# Altium PCB 74HC595_update.PcbDoc (part 2 of 2)
Units mil, origin at the board's own origin, x right, y up, seen from the top; angles counter-clockwise.
Board outline 2530 x 3200 mil, 2 copper layers (Top Layer, Bottom Layer); 370 components, 74 nets, 1020 pads, 340 vias.
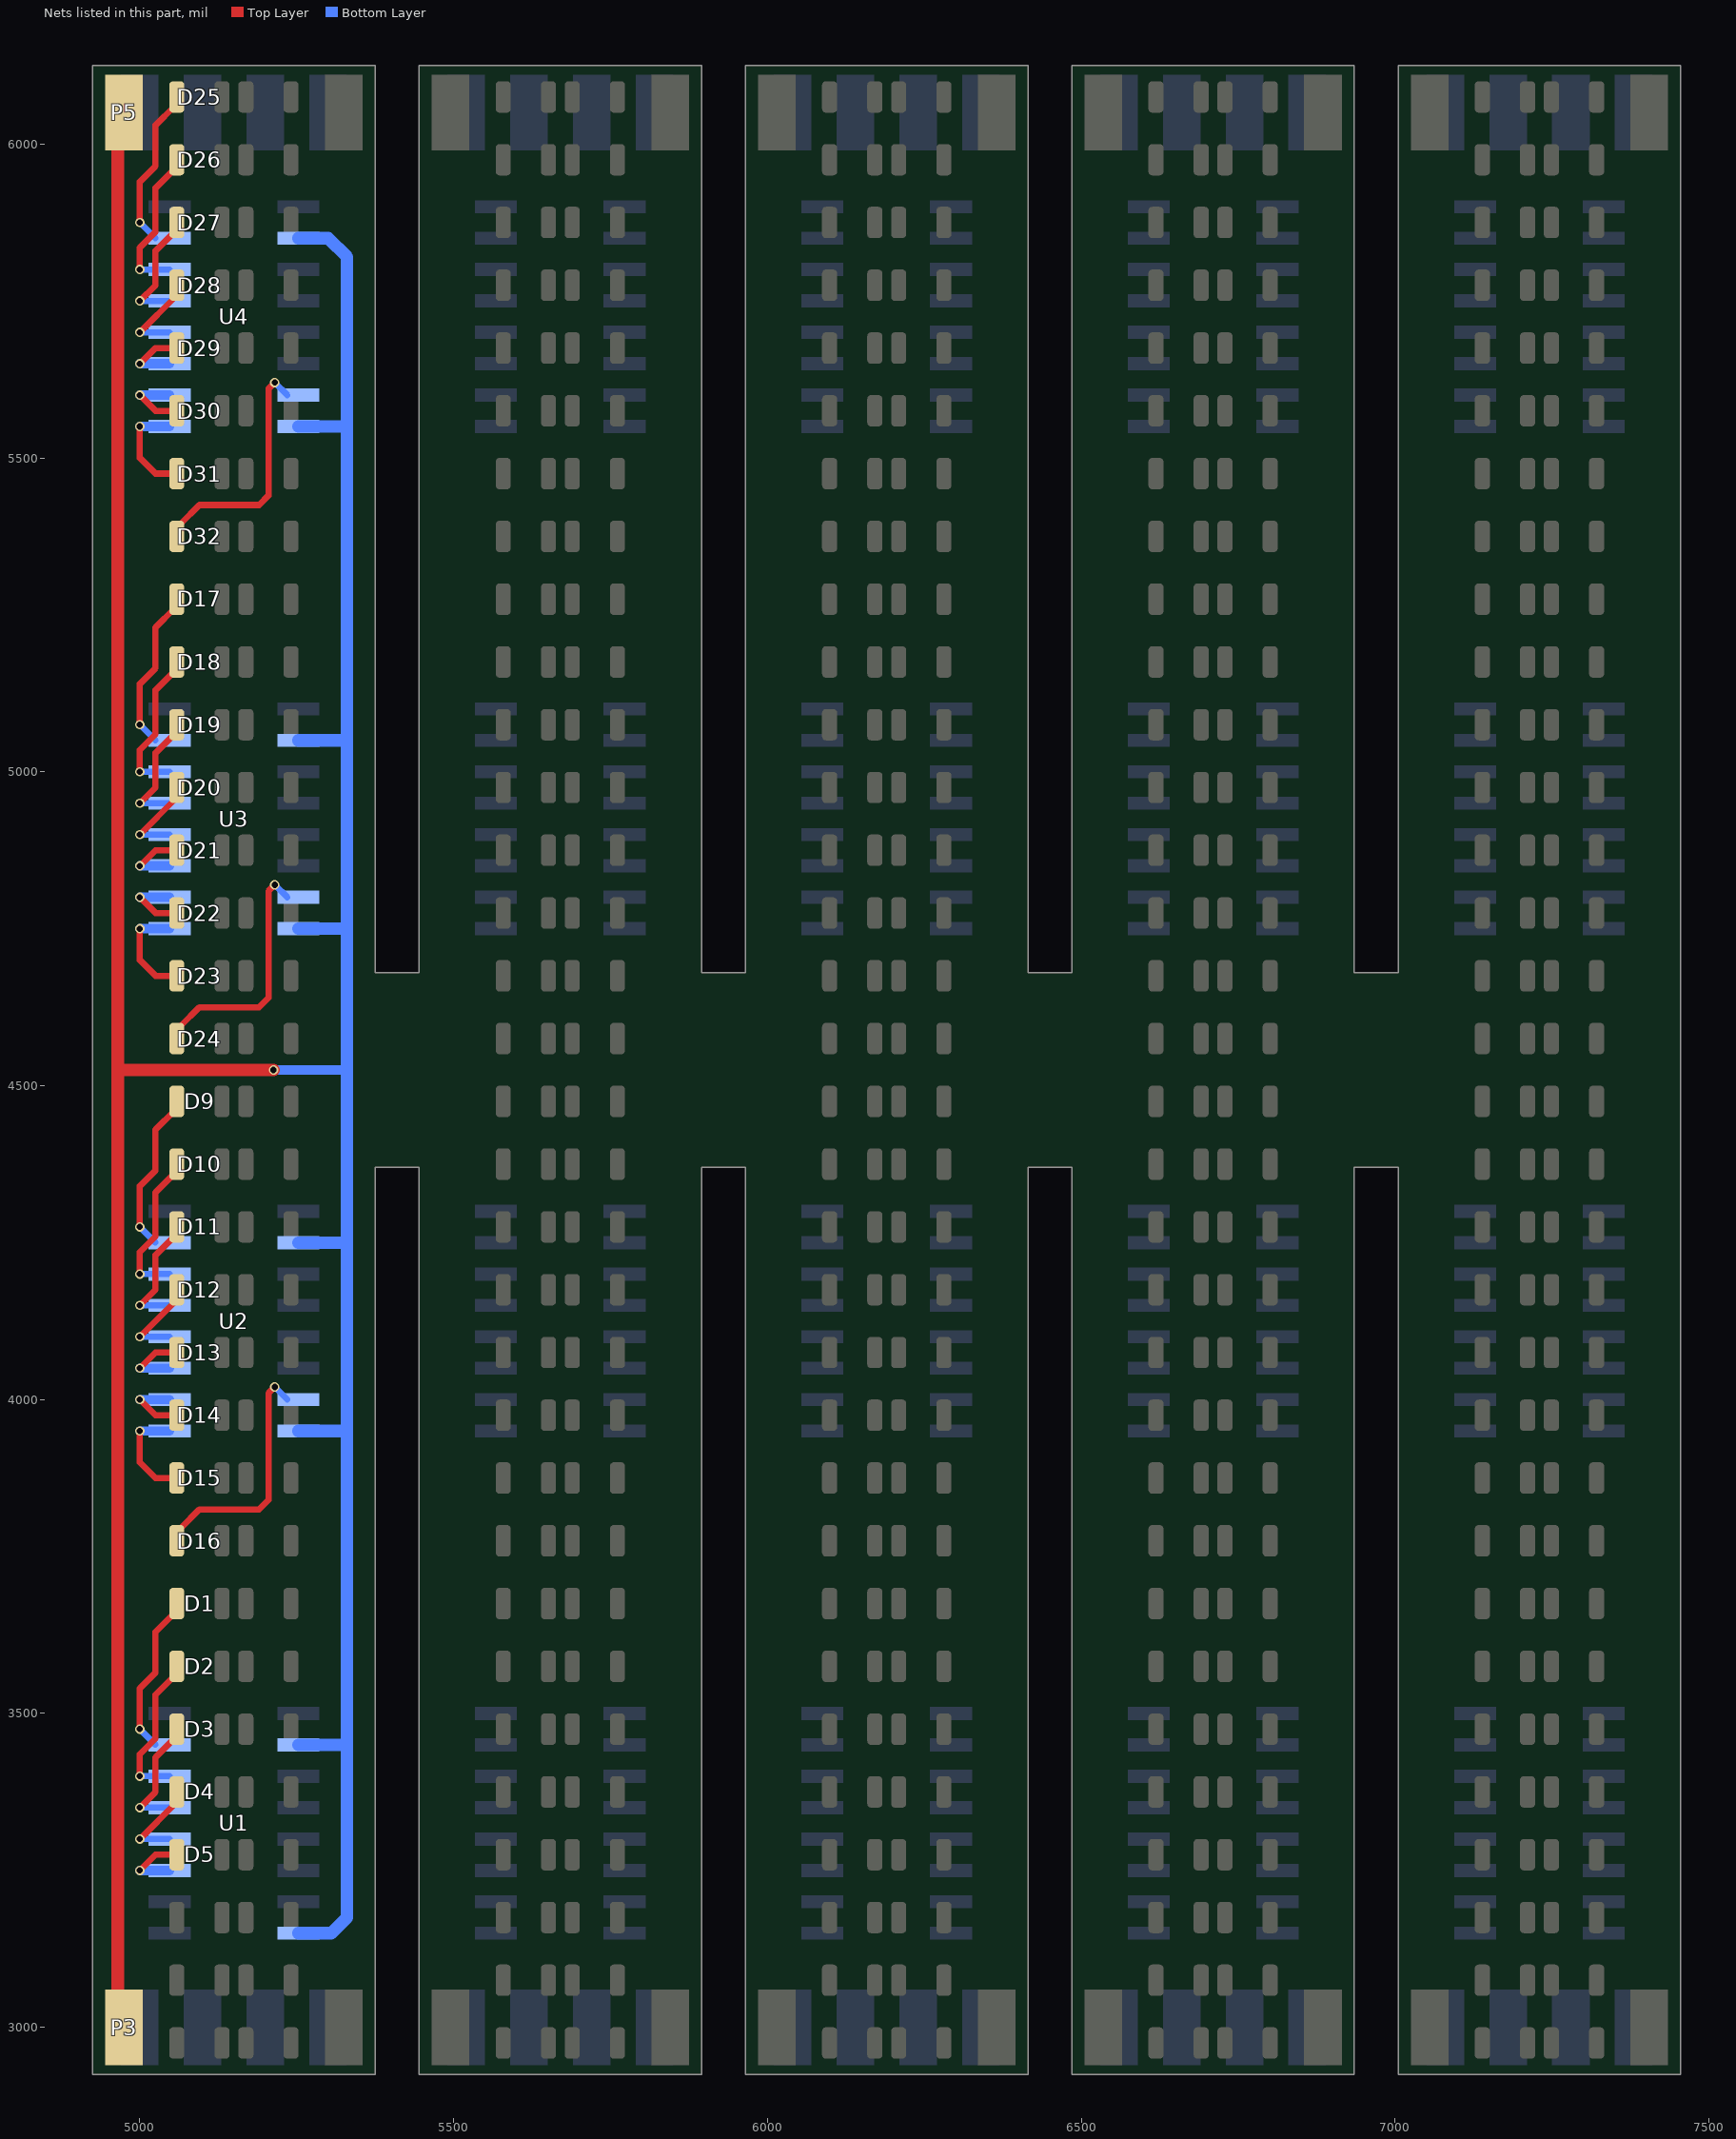
[diagram p2: the nets of this part, all layers, seen from the top]

## Via types
v1: diameter 15, hole 10, Top Layer to Bottom Layer, 340 vias

## Nets (pads, with @x,y where several pads share a name; then routed paths per layer and width w, separated by ;. In a path a pad name is that pad's centre, name@x,y a point inside that pad or via, vN(x,y) a via of type N, cw(c..) or ccw(c..) an arc to the next point about the centre after c; other vN are vias at no path point) (continued)
Q_A3: D5.2 U1.3 | length 116.9
  Top Layer w10: v1(5000,3250) 5025,3275 D5.2@5059,3275
  Bottom Layer w15: v1(5000,3250) U1.3@5047.5,3250
  other v1: 5000,3250
Q_A4: D4.2 U1.4 | length 128.8
  Top Layer w10: v1(5000,3300) D4.2@5057.5,3357.5
  Bottom Layer w10: v1(5000,3300) U1.4@5047.5,3300
  other v1: 5000,3300
Q_A5: D3.2 U1.5 | length 173.2
  Top Layer w10: v1(5000,3350) 5025,3375 5025,3430 D3.2@5050,3455
  Bottom Layer w10: v1(5000,3350) U1.5@5047.5,3350
  other v1: 5000,3350
Q_A6: D2.2 U1.6 | length 223.2
  Top Layer w10: v1(5000,3400) 5000,3435 5025,3460 5025,3530 D2.2@5050,3555
  Bottom Layer w10: v1(5000,3400) U1.6@5047.5,3400
  other v1: 5000,3400
Q_A7: D1.2 U1.7 | length 243.1
  Top Layer w10: v1(5000,3475) 5000,3540 5025,3565 5025,3630 D1.2@5055,3660
  Bottom Layer w10: v1(5000,3475) U1.7@5025,3450
  other v1: 5000,3475
Q_B0: D16.2 U2.15 | length 371.1
  Top Layer w10: D16.2@5065,3795 5095,3825 5190,3825 5205,3840 5205,4010 v1(5215,4020)
  Bottom Layer w10: v1(5215,4020) U2.15@5235,4000
Q_B1: D15.2 U2.1 | length 166.9
  Top Layer w10: v1(5000,3950) 5000,3900 5025,3875 D15.2@5059,3875
  Bottom Layer w15: v1(5000,3950) U2.1@5047.5,3950
Q_B2: D14.2 U2.2 | length 116.9
  Top Layer w10: v1(5000,4000) 5025,3975 D14.2@5059,3975
  Bottom Layer w15: v1(5000,4000) U2.2@5047.5,4000
Q_B3: D13.2 U2.3 | length 116.9
  Top Layer w10: v1(5000,4050) 5025,4075 D13.2@5059,4075
  Bottom Layer w15: v1(5000,4050) U2.3@5047.5,4050
  other v1: 5000,4050
Q_B4: D12.2 U2.4 | length 128.8
  Top Layer w10: v1(5000,4100) D12.2@5057.5,4157.5
  Bottom Layer w10: v1(5000,4100) U2.4@5047.5,4100
  other v1: 5000,4100
Q_B5: D11.2 U2.5 | length 173.2
  Top Layer w10: v1(5000,4150) 5025,4175 5025,4230 D11.2@5050,4255
  Bottom Layer w10: v1(5000,4150) U2.5@5047.5,4150
  other v1: 5000,4150
Q_B6: D10.2 U2.6 | length 223.2
  Top Layer w10: v1(5000,4200) 5000,4235 5025,4260 5025,4330 D10.2@5050,4355
  Bottom Layer w10: v1(5000,4200) U2.6@5047.5,4200
  other v1: 5000,4200
Q_B7: D9.2 U2.7 | length 243.1
  Top Layer w10: v1(5000,4275) 5000,4340 5025,4365 5025,4430 D9.2@5055,4460
  Bottom Layer w10: v1(5000,4275) U2.7@5025,4250
  other v1: 5000,4275
Q_C0: D24.2 U3.15 | length 371.1
  Top Layer w10: D24.2@5065,4595 5095,4625 5190,4625 5205,4640 5205,4810 v1(5215,4820)
  Bottom Layer w10: v1(5215,4820) U3.15@5235,4800
Q_C1: D23.2 U3.1 | length 166.9
  Top Layer w10: v1(5000,4750) 5000,4700 5025,4675 D23.2@5059,4675
  Bottom Layer w15: v1(5000,4750) U3.1@5047.5,4750
Q_C2: D22.2 U3.2 | length 116.9
  Top Layer w10: v1(5000,4800) 5025,4775 D22.2@5059,4775
  Bottom Layer w15: v1(5000,4800) U3.2@5047.5,4800
Q_C3: D21.2 U3.3 | length 164.4
  Top Layer w10: v1(5000,4850) 5025,4875 D21.2@5059,4875
  Bottom Layer w15: v1(5000,4850) U3.3@5047.5,4850 v1(5000,4850)
  other v1: 5000,4850
Q_C4: D20.2 U3.4 | length 176.3
  Top Layer w10: v1(5000,4900) D20.2@5057.5,4957.5
  Bottom Layer w10: v1(5000,4900) U3.4@5047.5,4900 v1(5000,4900)
  other v1: 5000,4900
Q_C5: D19.2 U3.5 | length 173.2
  Top Layer w10: v1(5000,4950) 5025,4975 5025,5030 D19.2@5050,5055
  Bottom Layer w10: v1(5000,4950) U3.5@5047.5,4950
  other v1: 5000,4950
Q_C6: D18.2 U3.6 | length 223.2
  Top Layer w10: v1(5000,5000) 5000,5035 5025,5060 5025,5130 D18.2@5050,5155
  Bottom Layer w10: v1(5000,5000) U3.6@5047.5,5000
  other v1: 5000,5000
Q_C7: D17.2 U3.7 | length 243.1
  Top Layer w10: v1(5000,5075) 5000,5140 5025,5165 5025,5230 D17.2@5055,5260
  Bottom Layer w10: v1(5000,5075) U3.7@5025,5050
  other v1: 5000,5075
Q_D0: D32.2 U4.15 | length 371.1
  Top Layer w10: D32.2@5065,5395 5095,5425 5190,5425 5205,5440 5205,5610 v1(5215,5620)
  Bottom Layer w10: v1(5215,5620) U4.15@5235,5600
Q_D1: D31.2 U4.1 | length 166.9
  Top Layer w10: v1(5000,5550) 5000,5500 5025,5475 D31.2@5059,5475
  Bottom Layer w15: v1(5000,5550) U4.1@5047.5,5550
Q_D2: D30.2 U4.2 | length 116.9
  Top Layer w10: v1(5000,5600) 5025,5575 D30.2@5059,5575
  Bottom Layer w15: v1(5000,5600) U4.2@5047.5,5600
Q_D3: D29.2 U4.3 | length 116.9
  Top Layer w10: v1(5000,5650) 5025,5675 D29.2@5059,5675
  Bottom Layer w15: v1(5000,5650) U4.3@5047.5,5650
Q_D4: D28.2 U4.4 | length 128.8
  Top Layer w10: v1(5000,5700) D28.2@5057.5,5757.5
  Bottom Layer w10: v1(5000,5700) U4.4@5047.5,5700
Q_D5: D27.2 U4.5 | length 173.2
  Top Layer w10: v1(5000,5750) 5025,5775 5025,5830 D27.2@5050,5855
  Bottom Layer w10: v1(5000,5750) U4.5@5047.5,5750
Q_D6: D26.2 U4.6 | length 223.2
  Top Layer w10: v1(5000,5800) 5000,5835 5025,5860 5025,5930 D26.2@5050,5955
  Bottom Layer w10: v1(5000,5800) U4.6@5047.5,5800
Q_D7: D25.2 U4.7 | length 243.1
  Top Layer w10: v1(5000,5875) 5000,5940 5025,5965 5025,6030 D25.2@5055,6060
  Bottom Layer w10: v1(5000,5875) U4.7@5025,5850
VCC: P3.1 P5.1 U1.10 U1.16 U2.10 U2.16 U3.10 U3.16 U4.10 U4.16 | length 6738.1
  Top Layer w10: P3.1@4975,3000 P3.1@5000,2975
  Top Layer w20: P3.1@4965,3000 4965,4525 ; P5.1@4965,6050 4965,4525 ; v1(5213,4525) 4965,4525
  Bottom Layer w15: v1(5213,4525) 5330,4525
  Bottom Layer w20: U1.16@5252.5,3150 5305,3150 5330,3175 5330,3450 ; U1.10@5252.5,3450 5330,3450 ; U2.16@5252.5,3950 5330,3950 ; U2.10@5252.5,4250 5330,4250 ; U3.16@5252.5,4750 5330,4750 ; U3.10@5252.5,5050 5330,5050 ; U4.16@5252.5,5550 5330,5550 ; U4.10@5252.5,5850 5300,5850 5330,5820 5330,5550 ; 5330,3450 5330,3950 ; 5330,3950 5330,4250 ; 5330,4250 5330,4525 5330,4750 ; 5330,4750 5330,5050 ; 5330,5050 5330,5550
pads on no net: D1_1.1 D1_1.2 D1_1_1.1 D1_1_1.2 D1_1_2.1 D1_1_2.2 D1_1_3.1 D1_1_3.2 D2_1.1 D2_1.2 D2_1_1.1 D2_1_1.2 D2_1_2.1 D2_1_2.2 D2_1_3.1 D2_1_3.2 D3_1.1 D3_1.2 D3_1_1.1 D3_1_1.2 D3_1_2.1 D3_1_2.2 D3_1_3.1 D3_1_3.2 D4_1.1 D4_1.2 D4_1_1.1 D4_1_1.2 D4_1_2.1 D4_1_2.2 D4_1_3.1 D4_1_3.2 D5_1.1 D5_1.2 D5_1_1.1 D5_1_1.2 D5_1_2.1 D5_1_2.2 D5_1_3.1 D5_1_3.2 D6_1.1 D6_1.2 D6_1_1.1 D6_1_1.2 D6_1_2.1 D6_1_2.2 D6_1_3.1 D6_1_3.2 D7_1.1 D7_1.2 D7_1_1.1 D7_1_1.2 D7_1_2.1 D7_1_2.2 D7_1_3.1 D7_1_3.2 D8_1.1 D8_1.2 D8_1_1.1 D8_1_1.2 D8_1_2.1 D8_1_2.2 D8_1_3.1 D8_1_3.2 D9_1.1 D9_1.2 D9_1_1.1 D9_1_1.2 D9_1_2.1 D9_1_2.2 D9_1_3.1 D9_1_3.2 D10_1.1 D10_1.2 D10_1_1.1 D10_1_1.2 D10_1_2.1 D10_1_2.2 D10_1_3.1 D10_1_3.2 D11_1.1 D11_1.2 D11_1_1.1 D11_1_1.2 D11_1_2.1 D11_1_2.2 D11_1_3.1 D11_1_3.2 D12_1.1 D12_1.2 D12_1_1.1 D12_1_1.2 D12_1_2.1 D12_1_2.2 D12_1_3.1 D12_1_3.2 D13_1.1 D13_1.2 D13_1_1.1 D13_1_1.2 D13_1_2.1 D13_1_2.2 D13_1_3.1 D13_1_3.2 D14_1.1 D14_1.2 D14_1_1.1 D14_1_1.2 D14_1_2.1 D14_1_2.2 D14_1_3.1 D14_1_3.2 D15_1.1 D15_1.2 D15_1_1.1 D15_1_1.2 D15_1_2.1 D15_1_2.2 D15_1_3.1 D15_1_3.2 D16_1.1 D16_1.2 D16_1_1.1 D16_1_1.2 D16_1_2.1 D16_1_2.2 D16_1_3.1 D16_1_3.2 D17_1.1 D17_1.2 D17_1_1.1 D17_1_1.2 D17_1_2.1 D17_1_2.2 D17_1_3.1 D17_1_3.2 D18_1.1 D18_1.2 D18_1_1.1 D18_1_1.2 D18_1_2.1 D18_1_2.2 D18_1_3.1 D18_1_3.2 D19_1.1 D19_1.2 D19_1_1.1 D19_1_1.2 D19_1_2.1 D19_1_2.2 D19_1_3.1 D19_1_3.2 D20_1.1 D20_1.2 D20_1_1.1 D20_1_1.2 D20_1_2.1 D20_1_2.2 D20_1_3.1 D20_1_3.2 D21_1.1 D21_1.2 D21_1_1.1 D21_1_1.2 D21_1_2.1 D21_1_2.2 D21_1_3.1 D21_1_3.2 D22_1.1 D22_1.2 D22_1_1.1 D22_1_1.2 D22_1_2.1 D22_1_2.2 D22_1_3.1 D22_1_3.2 D23_1.1 D23_1.2 D23_1_1.1 D23_1_1.2 D23_1_2.1 D23_1_2.2 D23_1_3.1 D23_1_3.2 D24_1.1 D24_1.2 D24_1_1.1 D24_1_1.2 D24_1_2.1 D24_1_2.2 D24_1_3.1 D24_1_3.2 D25_1.1 D25_1.2 D25_1_1.1 D25_1_1.2 D25_1_2.1 D25_1_2.2 D25_1_3.1 D25_1_3.2 D26_1.1 D26_1.2 D26_1_1.1 D26_1_1.2 D26_1_2.1 D26_1_2.2 D26_1_3.1 D26_1_3.2 D27_1.1 D27_1.2 D27_1_1.1 D27_1_1.2 D27_1_2.1 D27_1_2.2 D27_1_3.1 D27_1_3.2 D28_1.1 D28_1.2 D28_1_1.1 D28_1_1.2 D28_1_2.1 D28_1_2.2 D28_1_3.1 D28_1_3.2 D29_1.1 D29_1.2 D29_1_1.1 D29_1_1.2 D29_1_2.1 D29_1_2.2 D29_1_3.1 D29_1_3.2 D30_1.1 D30_1.2 D30_1_1.1 D30_1_1.2 D30_1_2.1 D30_1_2.2 D30_1_3.1 D30_1_3.2 D31_1.1 D31_1.2 D31_1_1.1 D31_1_1.2 D31_1_2.1 D31_1_2.2 D31_1_3.1 D31_1_3.2 D32_1.1 D32_1.2 D32_1_1.1 D32_1_1.2 D32_1_2.1 D32_1_2.2 D32_1_3.1 D32_1_3.2 P1_1.1 P1_1.2 P1_1.3 P1_1.4 P1_1_1.1 P1_1_1.2 P1_1_1.3 P1_1_1.4 P1_1_2.1 P1_1_2.2 P1_1_2.3 P1_1_2.4 P1_1_3.1 P1_1_3.2 P1_1_3.3 P1_1_3.4 P2_1.1 P2_1.2 P2_1.3 P2_1.4 P2_1_1.1 P2_1_1.2 P2_1_1.3 P2_1_1.4 P2_1_2.1 P2_1_2.2 P2_1_2.3 P2_1_2.4 P2_1_3.1 P2_1_3.2 P2_1_3.3 P2_1_3.4 P3_1.1 P3_1_1.1 P3_1_2.1 P3_1_3.1 P4_1.1 P4_1_1.1 P4_1_2.1 P4_1_3.1 P5_1.1 P5_1_1.1 P5_1_2.1 P5_1_3.1 P6_1.1 P6_1_1.1 P6_1_2.1 P6_1_3.1 R1_1.1 R1_1.2 R1_1_1.1 R1_1_1.2 R1_1_2.1 R1_1_2.2 R1_1_3.1 R1_1_3.2 R2_1.1 R2_1.2 R2_1_1.1 R2_1_1.2 R2_1_2.1 R2_1_2.2 R2_1_3.1 R2_1_3.2 R3_1.1 R3_1.2 R3_1_1.1 R3_1_1.2 R3_1_2.1 R3_1_2.2 R3_1_3.1 R3_1_3.2 R4_1.1 R4_1.2 R4_1_1.1 R4_1_1.2 R4_1_2.1 R4_1_2.2 R4_1_3.1 R4_1_3.2 R5_1.1 R5_1.2 R5_1_1.1 R5_1_1.2 R5_1_2.1 R5_1_2.2 R5_1_3.1 R5_1_3.2 R6_1.1 R6_1.2 R6_1_1.1 R6_1_1.2 R6_1_2.1 R6_1_2.2 R6_1_3.1 R6_1_3.2 R7_1.1 R7_1.2 R7_1_1.1 R7_1_1.2 R7_1_2.1 R7_1_2.2 R7_1_3.1 R7_1_3.2 R8_1.1 R8_1.2 R8_1_1.1 R8_1_1.2 R8_1_2.1 R8_1_2.2 R8_1_3.1 R8_1_3.2 R9_1.1 R9_1.2 R9_1_1.1 R9_1_1.2 R9_1_2.1 R9_1_2.2 R9_1_3.1 R9_1_3.2 R10_1.1 R10_1.2 R10_1_1.1 R10_1_1.2 R10_1_2.1 R10_1_2.2 R10_1_3.1 R10_1_3.2 R11_1.1 R11_1.2 R11_1_1.1 R11_1_1.2 R11_1_2.1 R11_1_2.2 R11_1_3.1 R11_1_3.2 R12_1.1 R12_1.2 R12_1_1.1 R12_1_1.2 R12_1_2.1 R12_1_2.2 R12_1_3.1 R12_1_3.2 R13_1.1 R13_1.2 R13_1_1.1 R13_1_1.2 R13_1_2.1 R13_1_2.2 R13_1_3.1 R13_1_3.2 R14_1.1 R14_1.2 R14_1_1.1 R14_1_1.2 R14_1_2.1 R14_1_2.2 R14_1_3.1 R14_1_3.2 R15_1.1 R15_1.2 R15_1_1.1 R15_1_1.2 R15_1_2.1 R15_1_2.2 R15_1_3.1 R15_1_3.2 R16_1.1 R16_1.2 R16_1_1.1 R16_1_1.2 R16_1_2.1 R16_1_2.2 R16_1_3.1 R16_1_3.2 R17_1.1 R17_1.2 R17_1_1.1 R17_1_1.2 R17_1_2.1 R17_1_2.2 R17_1_3.1 R17_1_3.2 R18_1.1 R18_1.2 R18_1_1.1 R18_1_1.2 R18_1_2.1 R18_1_2.2 R18_1_3.1 R18_1_3.2 R19_1.1 R19_1.2 R19_1_1.1 R19_1_1.2 R19_1_2.1 R19_1_2.2 R19_1_3.1 R19_1_3.2 R20_1.1 R20_1.2 R20_1_1.1 R20_1_1.2 R20_1_2.1 R20_1_2.2 R20_1_3.1 R20_1_3.2 R21_1.1 R21_1.2 R21_1_1.1 R21_1_1.2 R21_1_2.1 R21_1_2.2 R21_1_3.1 R21_1_3.2 R22_1.1 R22_1.2 R22_1_1.1 R22_1_1.2 R22_1_2.1 R22_1_2.2 R22_1_3.1 R22_1_3.2 R23_1.1 R23_1.2 R23_1_1.1 R23_1_1.2 R23_1_2.1 R23_1_2.2 R23_1_3.1 R23_1_3.2 R24_1.1 R24_1.2 R24_1_1.1 R24_1_1.2 R24_1_2.1 R24_1_2.2 R24_1_3.1 R24_1_3.2 R25_1.1 R25_1.2 R25_1_1.1 R25_1_1.2 R25_1_2.1 R25_1_2.2 R25_1_3.1 R25_1_3.2 R26_1.1 R26_1.2 R26_1_1.1 R26_1_1.2 R26_1_2.1 R26_1_2.2 R26_1_3.1 R26_1_3.2 R27_1.1 R27_1.2 R27_1_1.1 R27_1_1.2 R27_1_2.1 R27_1_2.2 R27_1_3.1 R27_1_3.2 R28_1.1 R28_1.2 R28_1_1.1 R28_1_1.2 R28_1_2.1 R28_1_2.2 R28_1_3.1 R28_1_3.2 R29_1.1 R29_1.2 R29_1_1.1 R29_1_1.2 R29_1_2.1 R29_1_2.2 R29_1_3.1 R29_1_3.2 R30_1.1 R30_1.2 R30_1_1.1 R30_1_1.2 R30_1_2.1 R30_1_2.2 R30_1_3.1 R30_1_3.2 R31_1.1 R31_1.2 R31_1_1.1 R31_1_1.2 R31_1_2.1 R31_1_2.2 R31_1_3.1 R31_1_3.2 R32_1.1 R32_1.2 R32_1_1.1 R32_1_1.2 R32_1_2.1 R32_1_2.2 R32_1_3.1 R32_1_3.2 U1_1.1 U1_1.2 U1_1.3 U1_1.4 U1_1.5 U1_1.6 U1_1.7 U1_1.8 U1_1.9 U1_1.10 U1_1.11 U1_1.12 U1_1.13 U1_1.14 U1_1.15 U1_1.16 U1_1_1.1 U1_1_1.2 U1_1_1.3 U1_1_1.4 U1_1_1.5 U1_1_1.6 U1_1_1.7 U1_1_1.8 U1_1_1.9 U1_1_1.10 U1_1_1.11 U1_1_1.12 U1_1_1.13 U1_1_1.14 U1_1_1.15 U1_1_1.16 U1_1_2.1 U1_1_2.2 U1_1_2.3 U1_1_2.4 U1_1_2.5 U1_1_2.6 U1_1_2.7 U1_1_2.8 U1_1_2.9 U1_1_2.10 U1_1_2.11 U1_1_2.12 U1_1_2.13 U1_1_2.14 U1_1_2.15 U1_1_2.16 U1_1_3.1 U1_1_3.2 U1_1_3.3 U1_1_3.4 U1_1_3.5 U1_1_3.6 U1_1_3.7 U1_1_3.8 U1_1_3.9 U1_1_3.10 U1_1_3.11 U1_1_3.12 U1_1_3.13 U1_1_3.14 U1_1_3.15 U1_1_3.16 U2_1.1 U2_1.2 U2_1.3 U2_1.4 U2_1.5 U2_1.6 U2_1.7 U2_1.8 U2_1.9 U2_1.10 U2_1.11 U2_1.12 U2_1.13 U2_1.14 U2_1.15 U2_1.16 U2_1_1.1 U2_1_1.2 U2_1_1.3 U2_1_1.4 U2_1_1.5 U2_1_1.6 U2_1_1.7 U2_1_1.8 U2_1_1.9 U2_1_1.10 U2_1_1.11 U2_1_1.12 U2_1_1.13 U2_1_1.14 U2_1_1.15 U2_1_1.16 U2_1_2.1 U2_1_2.2 U2_1_2.3 U2_1_2.4 U2_1_2.5 U2_1_2.6 U2_1_2.7 U2_1_2.8 U2_1_2.9 U2_1_2.10 U2_1_2.11 U2_1_2.12 U2_1_2.13 U2_1_2.14 U2_1_2.15 U2_1_2.16 U2_1_3.1 U2_1_3.2 U2_1_3.3 U2_1_3.4 U2_1_3.5 U2_1_3.6 U2_1_3.7 U2_1_3.8 U2_1_3.9 U2_1_3.10 U2_1_3.11 U2_1_3.12 U2_1_3.13 U2_1_3.14 U2_1_3.15 U2_1_3.16 U3_1.1 U3_1.2 U3_1.3 U3_1.4 U3_1.5 U3_1.6 U3_1.7 U3_1.8 U3_1.9 U3_1.10 U3_1.11 U3_1.12 U3_1.13 U3_1.14 U3_1.15 U3_1.16 U3_1_1.1 U3_1_1.2 U3_1_1.3 U3_1_1.4 U3_1_1.5 U3_1_1.6 U3_1_1.7 U3_1_1.8 U3_1_1.9 U3_1_1.10 U3_1_1.11 U3_1_1.12 U3_1_1.13 U3_1_1.14 U3_1_1.15 U3_1_1.16 U3_1_2.1 U3_1_2.2 U3_1_2.3 U3_1_2.4 U3_1_2.5 U3_1_2.6 U3_1_2.7 U3_1_2.8 U3_1_2.9 U3_1_2.10 U3_1_2.11 U3_1_2.12 U3_1_2.13 U3_1_2.14 U3_1_2.15 U3_1_2.16 U3_1_3.1 U3_1_3.2 U3_1_3.3 U3_1_3.4 U3_1_3.5 U3_1_3.6 U3_1_3.7 U3_1_3.8 U3_1_3.9 U3_1_3.10 U3_1_3.11 U3_1_3.12 U3_1_3.13 U3_1_3.14 U3_1_3.15 U3_1_3.16 U4_1.1 U4_1.2 U4_1.3 U4_1.4 U4_1.5 U4_1.6 U4_1.7 U4_1.8 U4_1.9 U4_1.10 U4_1.11 U4_1.12 U4_1.13 U4_1.14 U4_1.15 U4_1.16 U4_1_1.1 U4_1_1.2 U4_1_1.3 U4_1_1.4 U4_1_1.5 U4_1_1.6 U4_1_1.7 U4_1_1.8 U4_1_1.9 U4_1_1.10 U4_1_1.11 U4_1_1.12 U4_1_1.13 U4_1_1.14 U4_1_1.15 U4_1_1.16 U4_1_2.1 U4_1_2.2 U4_1_2.3 U4_1_2.4 U4_1_2.5 U4_1_2.6 U4_1_2.7 U4_1_2.8 U4_1_2.9 U4_1_2.10 U4_1_2.11 U4_1_2.12 U4_1_2.13 U4_1_2.14 U4_1_2.15 U4_1_2.16 U4_1_3.1 U4_1_3.2 U4_1_3.3 U4_1_3.4 U4_1_3.5 U4_1_3.6 U4_1_3.7 U4_1_3.8 U4_1_3.9 U4_1_3.10 U4_1_3.11 U4_1_3.12 U4_1_3.13 U4_1_3.14 U4_1_3.15 U4_1_3.16
copper on no net: | length 126659.2
  Top Layer w10: 5495,3000 5520,2975 ; v1(5520,3150) 5540,3150 5579,3111 5579,3075 ; v1(5520,3200) 5545,3175 5579,3175 ; v1(5520,3250) 5545,3275 5579,3275 ; v1(5520,3300) 5577.5,3357.5 ; v1(5520,3350) 5545,3375 5545,3430 5570,3455 ; v1(5520,3400) 5520,3435 5545,3460 5545,3530 5570,3555 ; v1(5520,3475) 5520,3540 5545,3565 5545,3630 5575,3660 ; v1(5520,3950) 5520,3900 5545,3875 5579,3875 ; v1(5520,4000) 5545,3975 5579,3975 ; v1(5520,4050) 5545,4075 5579,4075 ; v1(5520,4100) 5577.5,4157.5 ; v1(5520,4150) 5545,4175 5545,4230 5570,4255 ; v1(5520,4200) 5520,4235 5545,4260 5545,4330 5570,4355 ; v1(5520,4275) 5520,4340 5545,4365 5545,4430 5575,4460 ; v1(5520,4750) 5520,4700 5545,4675 5579,4675 ; v1(5520,4800) 5545,4775 5579,4775 ; v1(5520,4850) 5545,4875 5579,4875 ; v1(5520,4900) 5577.5,4957.5 ; v1(5520,4950) 5545,4975 5545,5030 5570,5055 ; v1(5520,5000) 5520,5035 5545,5060 5545,5130 5570,5155 ; v1(5520,5075) 5520,5140 5545,5165 5545,5230 5575,5260 ; v1(5520,5550) 5520,5500 5545,5475 5579,5475 ; v1(5520,5600) 5545,5575 5579,5575 ; v1(5520,5650) 5545,5675 5579,5675 ; v1(5520,5700) 5577.5,5757.5 ; v1(5520,5750) 5545,5775 5545,5830 5570,5855 ; v1(5520,5800) 5520,5835 5545,5860 5545,5930 5570,5955 ; v1(5520,5875) 5520,5940 5545,5965 5545,6030 5575,6060 ; 5585,2995 5615,3025 5710,3025 5725,3040 5725,3210 v1(5735,3220) ; 5585,3795 5615,3825 5710,3825 5725,3840 5725,4010 v1(5735,4020) ; 5585,4595 5615,4625 5710,4625 5725,4640 5725,4810 v1(5735,4820) ; 5585,5395 5615,5425 5710,5425 5725,5440 5725,5610 v1(5735,5620) ; 6015,3000 6040,2975 ; v1(6040,3150) 6060,3150 6099,3111 6099,3075 ; v1(6040,3200) 6065,3175 6099,3175 ; v1(6040,3250) 6065,3275 6099,3275 ; v1(6040,3300) 6097.5,3357.5 ; v1(6040,3350) 6065,3375 6065,3430 6090,3455 ; v1(6040,3400) 6040,3435 6065,3460 6065,3530 6090,3555 ; v1(6040,3475) 6040,3540 6065,3565 6065,3630 6095,3660 ; v1(6040,3950) 6040,3900 6065,3875 6099,3875 ; v1(6040,4000) 6065,3975 6099,3975 ; v1(6040,4050) 6065,4075 6099,4075 ; v1(6040,4100) 6097.5,4157.5 ; v1(6040,4150) 6065,4175 6065,4230 6090,4255 ; v1(6040,4200) 6040,4235 6065,4260 6065,4330 6090,4355 ; v1(6040,4275) 6040,4340 6065,4365 6065,4430 6095,4460 ; v1(6040,4750) 6040,4700 6065,4675 6099,4675 ; v1(6040,4800) 6065,4775 6099,4775 ; v1(6040,4850) 6065,4875 6099,4875 ; v1(6040,4900) 6097.5,4957.5 ; v1(6040,4950) 6065,4975 6065,5030 6090,5055 ; v1(6040,5000) 6040,5035 6065,5060 6065,5130 6090,5155 ; v1(6040,5075) 6040,5140 6065,5165 6065,5230 6095,5260 ; v1(6040,5550) 6040,5500 6065,5475 6099,5475 ; v1(6040,5600) 6065,5575 6099,5575 ; v1(6040,5650) 6065,5675 6099,5675 ; v1(6040,5700) 6097.5,5757.5 ; v1(6040,5750) 6065,5775 6065,5830 6090,5855 ; v1(6040,5800) 6040,5835 6065,5860 6065,5930 6090,5955 ; v1(6040,5875) 6040,5940 6065,5965 6065,6030 6095,6060 ; 6105,2995 6135,3025 6230,3025 6245,3040 6245,3210 v1(6255,3220) ; 6105,3795 6135,3825 6230,3825 6245,3840 6245,4010 v1(6255,4020) ; 6105,4595 6135,4625 6230,4625 6245,4640 6245,4810 v1(6255,4820) ; 6105,5395 6135,5425 6230,5425 6245,5440 6245,5610 v1(6255,5620) ; 6535,3000 6560,2975 ; v1(6560,3150) 6580,3150 6619,3111 6619,3075 ; v1(6560,3200) 6585,3175 6619,3175 ; v1(6560,3250) 6585,3275 6619,3275 ; v1(6560,3300) 6617.5,3357.5 ; v1(6560,3350) 6585,3375 6585,3430 6610,3455 ; v1(6560,3400) 6560,3435 6585,3460 6585,3530 6610,3555 ; v1(6560,3475) 6560,3540 6585,3565 6585,3630 6615,3660 ; v1(6560,3950) 6560,3900 6585,3875 6619,3875 ; v1(6560,4000) 6585,3975 6619,3975 ; v1(6560,4050) 6585,4075 6619,4075 ; v1(6560,4100) 6617.5,4157.5 ; v1(6560,4150) 6585,4175 6585,4230 6610,4255 ; v1(6560,4200) 6560,4235 6585,4260 6585,4330 6610,4355 ; v1(6560,4275) 6560,4340 6585,4365 6585,4430 6615,4460 ; v1(6560,4750) 6560,4700 6585,4675 6619,4675 ; v1(6560,4800) 6585,4775 6619,4775 ; v1(6560,4850) 6585,4875 6619,4875 ; v1(6560,4900) 6617.5,4957.5 ; v1(6560,4950) 6585,4975 6585,5030 6610,5055 ; v1(6560,5000) 6560,5035 6585,5060 6585,5130 6610,5155 ; v1(6560,5075) 6560,5140 6585,5165 6585,5230 6615,5260 ; v1(6560,5550) 6560,5500 6585,5475 6619,5475 ; v1(6560,5600) 6585,5575 6619,5575 ; v1(6560,5650) 6585,5675 6619,5675 ; v1(6560,5700) 6617.5,5757.5 ; v1(6560,5750) 6585,5775 6585,5830 6610,5855 ; v1(6560,5800) 6560,5835 6585,5860 6585,5930 6610,5955 ; v1(6560,5875) 6560,5940 6585,5965 6585,6030 6615,6060 ; 6625,2995 6655,3025 6750,3025 6765,3040 6765,3210 v1(6775,3220) ; 6625,3795 6655,3825 6750,3825 6765,3840 6765,4010 v1(6775,4020) ; 6625,4595 6655,4625 6750,4625 6765,4640 6765,4810 v1(6775,4820) ; 6625,5395 6655,5425 6750,5425 6765,5440 6765,5610 v1(6775,5620) ; 7055,3000 7080,2975 ; v1(7080,3150) 7100,3150 7139,3111 7139,3075 ; v1(7080,3200) 7105,3175 7139,3175 ; v1(7080,3250) 7105,3275 7139,3275 ; v1(7080,3300) 7137.5,3357.5 ; v1(7080,3350) 7105,3375 7105,3430 7130,3455 ; v1(7080,3400) 7080,3435 7105,3460 7105,3530 7130,3555 ; v1(7080,3475) 7080,3540 7105,3565 7105,3630 7135,3660 ; v1(7080,3950) 7080,3900 7105,3875 7139,3875 ; v1(7080,4000) 7105,3975 7139,3975 ; v1(7080,4050) 7105,4075 7139,4075 ; v1(7080,4100) 7137.5,4157.5 ; v1(7080,4150) 7105,4175 7105,4230 7130,4255 ; v1(7080,4200) 7080,4235 7105,4260 7105,4330 7130,4355 ; v1(7080,4275) 7080,4340 7105,4365 7105,4430 7135,4460 ; v1(7080,4750) 7080,4700 7105,4675 7139,4675 ; v1(7080,4800) 7105,4775 7139,4775 ; v1(7080,4850) 7105,4875 7139,4875 ; v1(7080,4900) 7137.5,4957.5 ; v1(7080,4950) 7105,4975 7105,5030 7130,5055 ; v1(7080,5000) 7080,5035 7105,5060 7105,5130 7130,5155 ; v1(7080,5075) 7080,5140 7105,5165 7105,5230 7135,5260 ; v1(7080,5550) 7080,5500 7105,5475 7139,5475 ; v1(7080,5600) 7105,5575 7139,5575 ; v1(7080,5650) 7105,5675 7139,5675 ; v1(7080,5700) 7137.5,5757.5 ; v1(7080,5750) 7105,5775 7105,5830 7130,5855 ; v1(7080,5800) 7080,5835 7105,5860 7105,5930 7130,5955 ; v1(7080,5875) 7080,5940 7105,5965 7105,6030 7135,6060 ; 7145,2995 7175,3025 7270,3025 7285,3040 7285,3210 v1(7295,3220) ; 7145,3795 7175,3825 7270,3825 7285,3840 7285,4010 v1(7295,4020) ; 7145,4595 7175,4625 7270,4625 7285,4640 7285,4810 v1(7295,4820) ; 7145,5395 7175,5425 7270,5425 7285,5440 7285,5610 v1(7295,5620)
  Top Layer w15: v1(5590,3525) 5761,3525 ; v1(5590,4325) 5761,4325 ; v1(5590,5125) 5761,5125 ; v1(5590,5925) 5761,5925 ; v1(5635,3425) v1(5720,3425) ; v1(5635,4225) v1(5720,4225) ; v1(5635,5025) v1(5720,5025) ; v1(5635,5825) v1(5720,5825) ; 5650,2975 5689,2975 ; 5650,3075 5689,3075 ; 5650,3175 5689,3175 ; 5650,3275 5689,3275 ; 5650,3375 5689,3375 ; 5650,3475 5689,3475 ; 5650,3575 5689,3575 ; 5650,3675 5689,3675 ; 5650,3775 5689,3775 ; 5650,3875 5689,3875 ; 5650,3975 5689,3975 ; 5650,4075 5689,4075 ; 5650,4175 5689,4175 ; 5650,4275 5689,4275 ; 5650,4375 5689,4375 ; 5650,4475 5689,4475 ; 5650,4575 5689,4575 ; 5650,4675 5689,4675 ; 5650,4775 5689,4775 ; 5650,4875 5689,4875 ; 5650,4975 5689,4975 ; 5650,5075 5689,5075 ; 5650,5175 5689,5175 ; 5650,5275 5689,5275 ; 5650,5375 5689,5375 ; 5650,5475 5689,5475 ; 5650,5575 5689,5575 ; 5650,5675 5689,5675 ; 5650,5775 5689,5775 ; 5650,5875 5689,5875 ; 5650,5975 5689,5975 ; 5650,6075 5689,6075 ; v1(5660,3325) v1(5720,3325) ; v1(5660,4125) v1(5720,4125) ; v1(5660,4925) v1(5720,4925) ; v1(5660,5725) v1(5720,5725) ; v1(6110,3525) 6281,3525 ; v1(6110,4325) 6281,4325 ; v1(6110,5125) 6281,5125 ; v1(6110,5925) 6281,5925 ; v1(6155,3425) v1(6240,3425) ; v1(6155,4225) v1(6240,4225) ; v1(6155,5025) v1(6240,5025) ; v1(6155,5825) v1(6240,5825) ; 6170,2975 6209,2975 ; 6170,3075 6209,3075 ; 6170,3175 6209,3175 ; 6170,3275 6209,3275 ; 6170,3375 6209,3375 ; 6170,3475 6209,3475 ; 6170,3575 6209,3575 ; 6170,3675 6209,3675 ; 6170,3775 6209,3775 ; 6170,3875 6209,3875 ; 6170,3975 6209,3975 ; 6170,4075 6209,4075 ; 6170,4175 6209,4175 ; 6170,4275 6209,4275 ; 6170,4375 6209,4375 ; 6170,4475 6209,4475 ; 6170,4575 6209,4575 ; 6170,4675 6209,4675 ; 6170,4775 6209,4775 ; 6170,4875 6209,4875 ; 6170,4975 6209,4975 ; 6170,5075 6209,5075 ; 6170,5175 6209,5175 ; 6170,5275 6209,5275 ; 6170,5375 6209,5375 ; 6170,5475 6209,5475 ; 6170,5575 6209,5575 ; 6170,5675 6209,5675 ; 6170,5775 6209,5775 ; 6170,5875 6209,5875 ; 6170,5975 6209,5975 ; 6170,6075 6209,6075 ; v1(6180,3325) v1(6240,3325) ; v1(6180,4125) v1(6240,4125) ; v1(6180,4925) v1(6240,4925) ; v1(6180,5725) v1(6240,5725) ; v1(6630,3525) 6801,3525 ; v1(6630,4325) 6801,4325 ; v1(6630,5125) 6801,5125 ; v1(6630,5925) 6801,5925 ; v1(6675,3425) v1(6760,3425) ; v1(6675,4225) v1(6760,4225) ; v1(6675,5025) v1(6760,5025) ; v1(6675,5825) v1(6760,5825) ; 6690,2975 6729,2975 ; 6690,3075 6729,3075 ; 6690,3175 6729,3175 ; 6690,3275 6729,3275 ; 6690,3375 6729,3375 ; 6690,3475 6729,3475 ; 6690,3575 6729,3575 ; 6690,3675 6729,3675 ; 6690,3775 6729,3775 ; 6690,3875 6729,3875 ; 6690,3975 6729,3975 ; 6690,4075 6729,4075 ; 6690,4175 6729,4175 ; 6690,4275 6729,4275 ; 6690,4375 6729,4375 ; 6690,4475 6729,4475 ; 6690,4575 6729,4575 ; 6690,4675 6729,4675 ; 6690,4775 6729,4775 ; 6690,4875 6729,4875 ; 6690,4975 6729,4975 ; 6690,5075 6729,5075 ; 6690,5175 6729,5175 ; 6690,5275 6729,5275 ; 6690,5375 6729,5375 ; 6690,5475 6729,5475 ; 6690,5575 6729,5575 ; 6690,5675 6729,5675 ; 6690,5775 6729,5775 ; 6690,5875 6729,5875 ; 6690,5975 6729,5975 ; 6690,6075 6729,6075 ; v1(6700,3325) v1(6760,3325) ; v1(6700,4125) v1(6760,4125) ; v1(6700,4925) v1(6760,4925) ; v1(6700,5725) v1(6760,5725) ; v1(7150,3525) 7321,3525 ; v1(7150,4325) 7321,4325 ; v1(7150,5125) 7321,5125 ; v1(7150,5925) 7321,5925 ; v1(7195,3425) v1(7280,3425) ; v1(7195,4225) v1(7280,4225) ; v1(7195,5025) v1(7280,5025) ; v1(7195,5825) v1(7280,5825) ; 7210,2975 7249,2975 ; 7210,3075 7249,3075 ; 7210,3175 7249,3175 ; 7210,3275 7249,3275 ; 7210,3375 7249,3375 ; 7210,3475 7249,3475 ; 7210,3575 7249,3575 ; 7210,3675 7249,3675 ; 7210,3775 7249,3775 ; 7210,3875 7249,3875 ; 7210,3975 7249,3975 ; 7210,4075 7249,4075 ; 7210,4175 7249,4175 ; 7210,4275 7249,4275 ; 7210,4375 7249,4375 ; 7210,4475 7249,4475 ; 7210,4575 7249,4575 ; 7210,4675 7249,4675 ; 7210,4775 7249,4775 ; 7210,4875 7249,4875 ; 7210,4975 7249,4975 ; 7210,5075 7249,5075 ; 7210,5175 7249,5175 ; 7210,5275 7249,5275 ; 7210,5375 7249,5375 ; 7210,5475 7249,5475 ; 7210,5575 7249,5575 ; 7210,5675 7249,5675 ; 7210,5775 7249,5775 ; 7210,5875 7249,5875 ; 7210,5975 7249,5975 ; 7210,6075 7249,6075 ; v1(7220,3325) v1(7280,3325) ; v1(7220,4125) v1(7280,4125) ; v1(7220,4925) v1(7280,4925) ; v1(7220,5725) v1(7280,5725)
  Top Layer w20: 5485,3000 5485,4525 ; 5485,6050 5485,4525 ; v1(5733,4525) 5485,4525 ; 5761,4475 5761,4375 5761,4325 5761,4275 5761,4175 5761,4075 5761,3975 5761,3875 5761,3775 5761,3675 5761,3575 5761,3525 5761,3475 5761,3375 5761,3275 5761,3175 5761,3075 5761,2975 5820,2975 ; 5761,4575 5761,4675 5761,4775 5761,4875 5761,4975 5761,5075 5761,5125 5761,5175 5761,5275 5761,5375 5761,5475 5761,5575 5761,5675 5761,5775 5761,5875 5761,5925 5761,5975 5761,6075 5820,6075 ; 5763,4475 5763,4575 ; 6005,3000 6005,4525 ; 6005,6050 6005,4525 ; v1(6253,4525) 6005,4525 ; 6281,4475 6281,4375 6281,4325 6281,4275 6281,4175 6281,4075 6281,3975 6281,3875 6281,3775 6281,3675 6281,3575 6281,3525 6281,3475 6281,3375 6281,3275 6281,3175 6281,3075 6281,2975 6340,2975 ; 6281,4575 6281,4675 6281,4775 6281,4875 6281,4975 6281,5075 6281,5125 6281,5175 6281,5275 6281,5375 6281,5475 6281,5575 6281,5675 6281,5775 6281,5875 6281,5925 6281,5975 6281,6075 6340,6075 ; 6283,4475 6283,4575 ; 6525,3000 6525,4525 ; 6525,6050 6525,4525 ; v1(6773,4525) 6525,4525 ; 6801,4475 6801,4375 6801,4325 6801,4275 6801,4175 6801,4075 6801,3975 6801,3875 6801,3775 6801,3675 6801,3575 6801,3525 6801,3475 6801,3375 6801,3275 6801,3175 6801,3075 6801,2975 6860,2975 ; 6801,4575 6801,4675 6801,4775 6801,4875 6801,4975 6801,5075 6801,5125 6801,5175 6801,5275 6801,5375 6801,5475 6801,5575 6801,5675 6801,5775 6801,5875 6801,5925 6801,5975 6801,6075 6860,6075 ; 6803,4475 6803,4575 ; 7045,3000 7045,4525 ; 7045,6050 7045,4525 ; v1(7293,4525) 7045,4525 ; 7321,4475 7321,4375 7321,4325 7321,4275 7321,4175 7321,4075 7321,3975 7321,3875 7321,3775 7321,3675 7321,3575 7321,3525 7321,3475 7321,3375 7321,3275 7321,3175 7321,3075 7321,2975 7380,2975 ; 7321,4575 7321,4675 7321,4775 7321,4875 7321,4975 7321,5075 7321,5125 7321,5175 7321,5275 7321,5375 7321,5475 7321,5575 7321,5675 7321,5775 7321,5875 7321,5925 7321,5975 7321,6075 7380,6075 ; 7323,4475 7323,4575
  Bottom Layer w10: v1(5520,3300) 5567.5,3300 ; v1(5520,3350) 5567.5,3350 ; v1(5520,3400) 5567.5,3400 ; v1(5520,3475) 5545,3450 ; v1(5520,4100) 5567.5,4100 ; v1(5520,4150) 5567.5,4150 ; v1(5520,4200) 5567.5,4200 ; v1(5520,4275) 5545,4250 ; v1(5520,4950) 5567.5,4950 ; v1(5520,5000) 5567.5,5000 ; v1(5520,5075) 5545,5050 ; v1(5520,5700) 5567.5,5700 ; v1(5520,5750) 5567.5,5750 ; v1(5520,5800) 5567.5,5800 ; v1(5520,5875) 5545,5850 ; v1(5735,3220) 5755,3200 ; v1(5735,4020) 5755,4000 ; v1(5735,4820) 5755,4800 ; v1(5735,5620) 5755,5600 ; v1(6040,3300) 6087.5,3300 ; v1(6040,3350) 6087.5,3350 ; v1(6040,3400) 6087.5,3400 ; v1(6040,3475) 6065,3450 ; v1(6040,4100) 6087.5,4100 ; v1(6040,4150) 6087.5,4150 ; v1(6040,4200) 6087.5,4200 ; v1(6040,4275) 6065,4250 ; v1(6040,4950) 6087.5,4950 ; v1(6040,5000) 6087.5,5000 ; v1(6040,5075) 6065,5050 ; v1(6040,5700) 6087.5,5700 ; v1(6040,5750) 6087.5,5750 ; v1(6040,5800) 6087.5,5800 ; v1(6040,5875) 6065,5850 ; v1(6255,3220) 6275,3200 ; v1(6255,4020) 6275,4000 ; v1(6255,4820) 6275,4800 ; v1(6255,5620) 6275,5600 ; v1(6560,3300) 6607.5,3300 ; v1(6560,3350) 6607.5,3350 ; v1(6560,3400) 6607.5,3400 ; v1(6560,3475) 6585,3450 ; v1(6560,4100) 6607.5,4100 ; v1(6560,4150) 6607.5,4150 ; v1(6560,4200) 6607.5,4200 ; v1(6560,4275) 6585,4250 ; v1(6560,4950) 6607.5,4950 ; v1(6560,5000) 6607.5,5000 ; v1(6560,5075) 6585,5050 ; v1(6560,5700) 6607.5,5700 ; v1(6560,5750) 6607.5,5750 ; v1(6560,5800) 6607.5,5800 ; v1(6560,5875) 6585,5850 ; v1(6775,3220) 6795,3200 ; v1(6775,4020) 6795,4000 ; v1(6775,4820) 6795,4800 ; v1(6775,5620) 6795,5600 ; v1(7080,3300) 7127.5,3300 ; v1(7080,3350) 7127.5,3350 ; v1(7080,3400) 7127.5,3400 ; v1(7080,3475) 7105,3450 ; v1(7080,4100) 7127.5,4100 ; v1(7080,4150) 7127.5,4150 ; v1(7080,4200) 7127.5,4200 ; v1(7080,4275) 7105,4250 ; v1(7080,4950) 7127.5,4950 ; v1(7080,5000) 7127.5,5000 ; v1(7080,5075) 7105,5050 ; v1(7080,5700) 7127.5,5700 ; v1(7080,5750) 7127.5,5750 ; v1(7080,5800) 7127.5,5800 ; v1(7080,5875) 7105,5850 ; v1(7295,3220) 7315,3200 ; v1(7295,4020) 7315,4000 ; v1(7295,4820) 7315,4800 ; v1(7295,5620) 7315,5600 ; v1(5520,4900) 5567.5,4900 v1(5520,4900) ; v1(6040,4900) 6087.5,4900 v1(6040,4900) ; v1(6560,4900) 6607.5,4900 v1(6560,4900) ; v1(7080,4900) 7127.5,4900 v1(7080,4900)
  Bottom Layer w15: 5520,3000 5520,3075 5545,3100 5595,3100 5595,3100.36 5635,3140.36 v1(5635,4225) v1(5635,5025) v1(5635,5825) 5635,5915 5600,5950 5545,5950 5520,5975 5520,6050 ; v1(5520,3150) 5567.5,3150 ; v1(5520,3200) 5567.5,3200 ; v1(5520,3250) 5567.5,3250 ; v1(5520,3950) 5567.5,3950 ; v1(5520,4000) 5567.5,4000 ; v1(5520,4050) 5567.5,4050 ; v1(5520,4750) 5567.5,4750 ; v1(5520,4800) 5567.5,4800 ; v1(5520,5550) 5567.5,5550 ; v1(5520,5600) 5567.5,5600 ; v1(5520,5650) 5567.5,5650 ; 5590,3500 v1(5590,3525) ; 5590,4300 v1(5590,4325) ; 5590,5100 v1(5590,5125) ; 5590,5900 v1(5590,5925) ; 5620,3000 5620,3090 5660,3130 v1(5660,4125) v1(5660,4925) v1(5660,5725) 5660,5930 5620,5970 5620,6050 ; 5685,3300 5772.5,3300 ; 5685,4100 5772.5,4100 ; 5685,4900 5772.5,4900 ; 5720,3000 5720,3090 5685,3125 5685,5700 ; v1(5720,3325) 5745,3350 ; v1(5720,3425) 5745,3400 ; v1(5720,4125) 5745,4150 ; v1(5720,4225) 5745,4200 ; v1(5720,4925) 5745,4950 ; v1(5720,5025) 5745,5000 ; v1(5720,5725) 5745,5750 ; v1(5720,5825) 5745,5800 ; 5720,6050 5720,5970 5685,5935 5685,5700 ; v1(5733,4525) 5850,4525 ; 5772.5,3500 5730,3500 5710,3520 5710,4030 ; 5772.5,4300 5730,4300 5710,4320 5710,4830 ; 5772.5,5650 5730,5650 5710,5630 5710,5120 ; 5772.5,5700 5685,5700 ; 5772.5,5900 5772.5,5972.5 5820,6020 5820,6050 ; 5820,3000 5820,3070 5790,3100 5750,3100 5710,3140 5710,3230 ; 6040,3000 6040,3075 6065,3100 6115,3100 6115,3100.36 6155,3140.36 v1(6155,4225) v1(6155,5025) v1(6155,5825) 6155,5915 6120,5950 6065,5950 6040,5975 6040,6050 ; v1(6040,3150) 6087.5,3150 ; v1(6040,3200) 6087.5,3200 ; v1(6040,3250) 6087.5,3250 ; v1(6040,3950) 6087.5,3950 ; v1(6040,4000) 6087.5,4000 ; v1(6040,4050) 6087.5,4050 ; v1(6040,4750) 6087.5,4750 ; v1(6040,4800) 6087.5,4800 ; v1(6040,5550) 6087.5,5550 ; v1(6040,5600) 6087.5,5600 ; v1(6040,5650) 6087.5,5650 ; 6110,3500 v1(6110,3525) ; 6110,4300 v1(6110,4325) ; 6110,5100 v1(6110,5125) ; 6110,5900 v1(6110,5925) ; 6140,3000 6140,3090 6180,3130 v1(6180,4125) v1(6180,4925) v1(6180,5725) 6180,5930 6140,5970 6140,6050 ; 6205,3300 6292.5,3300 ; 6205,4100 6292.5,4100 ; 6205,4900 6292.5,4900 ; 6240,3000 6240,3090 6205,3125 6205,5700 ; v1(6240,3325) 6265,3350 ; v1(6240,3425) 6265,3400 ; v1(6240,4125) 6265,4150 ; v1(6240,4225) 6265,4200 ; v1(6240,4925) 6265,4950 ; v1(6240,5025) 6265,5000 ; v1(6240,5725) 6265,5750 ; v1(6240,5825) 6265,5800 ; 6240,6050 6240,5970 6205,5935 6205,5700 ; v1(6253,4525) 6370,4525 ; 6292.5,3500 6250,3500 6230,3520 6230,4030 ; 6292.5,4300 6250,4300 6230,4320 6230,4830 ; 6292.5,5650 6250,5650 6230,5630 6230,5120 ; 6292.5,5700 6205,5700 ; 6292.5,5900 6292.5,5972.5 6340,6020 6340,6050 ; 6340,3000 6340,3070 6310,3100 6270,3100 6230,3140 6230,3230 ; 6560,3000 6560,3075 6585,3100 6635,3100 6635,3100.36 6675,3140.36 v1(6675,4225) v1(6675,5025) v1(6675,5825) 6675,5915 6640,5950 6585,5950 6560,5975 6560,6050 ; v1(6560,3150) 6607.5,3150 ; v1(6560,3200) 6607.5,3200 ; v1(6560,3250) 6607.5,3250 ; v1(6560,3950) 6607.5,3950 ; v1(6560,4000) 6607.5,4000 ; v1(6560,4050) 6607.5,4050 ; v1(6560,4750) 6607.5,4750 ; v1(6560,4800) 6607.5,4800 ; v1(6560,5550) 6607.5,5550 ; v1(6560,5600) 6607.5,5600 ; v1(6560,5650) 6607.5,5650 ; 6630,3500 v1(6630,3525) ; 6630,4300 v1(6630,4325) ; 6630,5100 v1(6630,5125) ; 6630,5900 v1(6630,5925) ; 6660,3000 6660,3090 6700,3130 v1(6700,4125) v1(6700,4925) v1(6700,5725) 6700,5930 6660,5970 6660,6050 ; 6725,3300 6812.5,3300 ; 6725,4100 6812.5,4100 ; 6725,4900 6812.5,4900 ; 6760,3000 6760,3090 6725,3125 6725,5700 ; v1(6760,3325) 6785,3350 ; v1(6760,3425) 6785,3400 ; v1(6760,4125) 6785,4150 ; v1(6760,4225) 6785,4200 ; v1(6760,4925) 6785,4950 ; v1(6760,5025) 6785,5000 ; v1(6760,5725) 6785,5750 ; v1(6760,5825) 6785,5800 ; 6760,6050 6760,5970 6725,5935 6725,5700 ; v1(6773,4525) 6890,4525 ; 6812.5,3500 6770,3500 6750,3520 6750,4030 ; 6812.5,4300 6770,4300 6750,4320 6750,4830 ; 6812.5,5650 6770,5650 6750,5630 6750,5120 ; 6812.5,5700 6725,5700 ; 6812.5,5900 6812.5,5972.5 6860,6020 6860,6050 ; 6860,3000 6860,3070 6830,3100 6790,3100 6750,3140 6750,3230 ; 7080,3000 7080,3075 7105,3100 7155,3100 7155,3100.36 7195,3140.36 v1(7195,4225) v1(7195,5025) v1(7195,5825) 7195,5915 7160,5950 7105,5950 7080,5975 7080,6050 ; v1(7080,3150) 7127.5,3150 ; v1(7080,3200) 7127.5,3200 ; v1(7080,3250) 7127.5,3250 ; v1(7080,3950) 7127.5,3950 ; v1(7080,4000) 7127.5,4000 ; v1(7080,4050) 7127.5,4050 ; v1(7080,4750) 7127.5,4750 ; v1(7080,4800) 7127.5,4800 ; v1(7080,5550) 7127.5,5550 ; v1(7080,5600) 7127.5,5600 ; v1(7080,5650) 7127.5,5650 ; 7150,3500 v1(7150,3525) ; 7150,4300 v1(7150,4325) ; 7150,5100 v1(7150,5125) ; 7150,5900 v1(7150,5925) ; 7180,3000 7180,3090 7220,3130 v1(7220,4125) v1(7220,4925) v1(7220,5725) 7220,5930 7180,5970 7180,6050 ; 7245,3300 7332.5,3300 ; 7245,4100 7332.5,4100 ; 7245,4900 7332.5,4900 ; 7280,3000 7280,3090 7245,3125 7245,5700 ; v1(7280,3325) 7305,3350 ; v1(7280,3425) 7305,3400 ; v1(7280,4125) 7305,4150 ; v1(7280,4225) 7305,4200 ; v1(7280,4925) 7305,4950 ; v1(7280,5025) 7305,5000 ; v1(7280,5725) 7305,5750 ; v1(7280,5825) 7305,5800 ; 7280,6050 7280,5970 7245,5935 7245,5700 ; v1(7293,4525) 7410,4525 ; 7332.5,3500 7290,3500 7270,3520 7270,4030 ; 7332.5,4300 7290,4300 7270,4320 7270,4830 ; 7332.5,5650 7290,5650 7270,5630 7270,5120 ; 7332.5,5700 7245,5700 ; 7332.5,5900 7332.5,5972.5 7380,6020 7380,6050 ; 7380,3000 7380,3070 7350,3100 7310,3100 7270,3140 7270,3230 ; 5710,3230 5730,3250 ; 5710,3230 5730,3250 ; 5710,4030 5730,4050 ; 5710,4030 5730,4050 ; 5710,4830 5730,4850 ; 5710,4830 5730,4850 ; 5710,4830 5730,4850 ; 5710,5120 5730,5100 ; 5710,5120 5730,5100 ; 5730,3250 5772.5,3250 5730,3250 ; 5730,4050 5772.5,4050 5730,4050 ; 5730,4850 5772.5,4850 ; 5730,4850 5772.5,4850 ; 5730,4850 5772.5,4850 ; 5730,5100 5772.5,5100 5730,5100 ; 6230,3230 6250,3250 ; 6230,3230 6250,3250 ; 6230,4030 6250,4050 ; 6230,4030 6250,4050 ; 6230,4830 6250,4850 ; 6230,4830 6250,4850 ; 6230,4830 6250,4850 ; 6230,5120 6250,5100 ; 6230,5120 6250,5100 ; 6250,3250 6292.5,3250 6250,3250 ; 6250,4050 6292.5,4050 6250,4050 ; 6250,4850 6292.5,4850 ; 6250,4850 6292.5,4850 ; 6250,4850 6292.5,4850 ; 6250,5100 6292.5,5100 6250,5100 ; 6750,3230 6770,3250 ; 6750,3230 6770,3250 ; 6750,4030 6770,4050 ; 6750,4030 6770,4050 ; 6750,4830 6770,4850 ; 6750,4830 6770,4850 ; 6750,4830 6770,4850 ; 6750,5120 6770,5100 ; 6750,5120 6770,5100 ; 6770,3250 6812.5,3250 6770,3250 ; 6770,4050 6812.5,4050 6770,4050 ; 6770,4850 6812.5,4850 ; 6770,4850 6812.5,4850 ; 6770,4850 6812.5,4850 ; 6770,5100 6812.5,5100 6770,5100 ; 7270,3230 7290,3250 ; 7270,3230 7290,3250 ; 7270,4030 7290,4050 ; 7270,4030 7290,4050 ; 7270,4830 7290,4850 ; 7270,4830 7290,4850 ; 7270,4830 7290,4850 ; 7270,5120 7290,5100 ; 7270,5120 7290,5100 ; 7290,3250 7332.5,3250 7290,3250 ; 7290,4050 7332.5,4050 7290,4050 ; 7290,4850 7332.5,4850 ; 7290,4850 7332.5,4850 ; 7290,4850 7332.5,4850 ; 7290,5100 7332.5,5100 7290,5100 ; v1(5520,4850) 5567.5,4850 v1(5520,4850) ; v1(6040,4850) 6087.5,4850 v1(6040,4850) ; v1(6560,4850) 6607.5,4850 v1(6560,4850) ; v1(7080,4850) 7127.5,4850 v1(7080,4850)
  Bottom Layer w20: 5772.5,3150 5825,3150 5850,3175 5850,3450 ; 5772.5,3450 5850,3450 ; 5772.5,3950 5850,3950 ; 5772.5,4250 5850,4250 ; 5772.5,4750 5850,4750 ; 5772.5,5050 5850,5050 ; 5772.5,5550 5850,5550 ; 5772.5,5850 5820,5850 5850,5820 5850,5550 ; 6292.5,3150 6345,3150 6370,3175 6370,3450 ; 6292.5,3450 6370,3450 ; 6292.5,3950 6370,3950 ; 6292.5,4250 6370,4250 ; 6292.5,4750 6370,4750 ; 6292.5,5050 6370,5050 ; 6292.5,5550 6370,5550 ; 6292.5,5850 6340,5850 6370,5820 6370,5550 ; 6812.5,3150 6865,3150 6890,3175 6890,3450 ; 6812.5,3450 6890,3450 ; 6812.5,3950 6890,3950 ; 6812.5,4250 6890,4250 ; 6812.5,4750 6890,4750 ; 6812.5,5050 6890,5050 ; 6812.5,5550 6890,5550 ; 6812.5,5850 6860,5850 6890,5820 6890,5550 ; 7332.5,3150 7385,3150 7410,3175 7410,3450 ; 7332.5,3450 7410,3450 ; 7332.5,3950 7410,3950 ; 7332.5,4250 7410,4250 ; 7332.5,4750 7410,4750 ; 7332.5,5050 7410,5050 ; 7332.5,5550 7410,5550 ; 7332.5,5850 7380,5850 7410,5820 7410,5550 ; 5850,3450 5850,3950 ; 5850,3950 5850,4250 ; 5850,4250 5850,4525 5850,4750 ; 5850,4750 5850,5050 ; 5850,5050 5850,5550 ; 6370,3450 6370,3950 ; 6370,3950 6370,4250 ; 6370,4250 6370,4525 6370,4750 ; 6370,4750 6370,5050 ; 6370,5050 6370,5550 ; 6890,3450 6890,3950 ; 6890,3950 6890,4250 ; 6890,4250 6890,4525 6890,4750 ; 6890,4750 6890,5050 ; 6890,5050 6890,5550 ; 7410,3450 7410,3950 ; 7410,3950 7410,4250 ; 7410,4250 7410,4525 7410,4750 ; 7410,4750 7410,5050 ; 7410,5050 7410,5550
  other v1: 5520,3250 6040,3250 6560,3250 7080,3250 5520,3300 6040,3300 6560,3300 7080,3300 5520,3350 6040,3350 6560,3350 7080,3350 5520,3400 6040,3400 6560,3400 7080,3400 5520,3475 6040,3475 6560,3475 7080,3475 5520,4050 6040,4050 6560,4050 7080,4050 5520,4100 6040,4100 6560,4100 7080,4100 5520,4150 6040,4150 6560,4150 7080,4150 5520,4200 6040,4200 6560,4200 7080,4200 5520,4275 6040,4275 6560,4275 7080,4275 5520,4850 6040,4850 6560,4850 7080,4850 5520,4900 6040,4900 6560,4900 7080,4900 5520,4950 6040,4950 6560,4950 7080,4950 5520,5000 6040,5000 6560,5000 7080,5000 5520,5075 6040,5075 6560,5075 7080,5075

## Keep-outs
Keep-Out Layer:
  circle w10: c6940,4405 r21.65
  circle w10: c6940,4465 r21.65
  circle w10: c6940,4525 r21.65
  circle w10: c6940,4585 r21.65
  circle w10: c6940,4645 r21.65
  circle w10: c7000,4645 r21.65
  circle w10: c7000,4585 r21.65
  circle w10: c7000,4525 r21.65
  circle w10: c7000,4465 r21.65
  circle w10: c7000,4405 r21.65
  circle w10: c6420,4405 r21.65
  circle w10: c6420,4465 r21.65
  circle w10: c6420,4525 r21.65
  circle w10: c6420,4585 r21.65
  circle w10: c6420,4645 r21.65
  circle w10: c6480,4645 r21.65
  circle w10: c6480,4585 r21.65
  circle w10: c6480,4525 r21.65
  circle w10: c6480,4465 r21.65
  circle w10: c6480,4405 r21.65
  circle w10: c5900,4405 r21.65
  circle w10: c5900,4465 r21.65
  circle w10: c5900,4525 r21.65
  circle w10: c5900,4585 r21.65
  circle w10: c5900,4645 r21.65
  circle w10: c5960,4645 r21.65
  circle w10: c5960,4585 r21.65
  circle w10: c5960,4525 r21.65
  circle w10: c5960,4465 r21.65
  circle w10: c5960,4405 r21.65
  circle w10: c5440,4405 r21.65
  circle w10: c5440,4465 r21.65
  circle w10: c5440,4525 r21.65
  circle w10: c5440,4585 r21.65
  circle w10: c5440,4645 r21.65
  circle w10: c5380,4645 r21.65
  circle w10: c5380,4585 r21.65
  circle w10: c5380,4525 r21.65
  circle w10: c5380,4465 r21.65
  circle w10: c5380,4405 r21.65
  lines w10: 4925,2925 5375,2925 5375,4370 5445,4370 5445,2925 5895,2925 5895,4370 5965,4370 5965,2925 6415,2925 6415,4370 6485,4370 6485,2925 6935,2925 6935,4370 7005,4370 7005,2925 7455,2925 7455,6125 7005,6125 7005,4680 6935,4680 6935,6125 6485,6125 6485,4680 6415,4680 6415,6125 5965,6125 5965,4680 5895,4680 5895,6125 5445,6125 5445,4680 5375,4680 5375,6125 4925,6125 4925,2925

## Text inside footprints (layer, text, board x,y; h text height)
U1: Mechanical 13 "*" at 5074,3181 h50 r180; Bottom Overlay "*" at 5025,3134 h50 r180
U1_1: Mechanical 13 "*" at 5594,3181 h50 r180; Bottom Overlay "*" at 5545,3134 h50 r180
U1_1_1: Mechanical 13 "*" at 6114,3181 h50 r180; Bottom Overlay "*" at 6065,3134 h50 r180
U1_1_2: Mechanical 13 "*" at 6634,3181 h50 r180; Bottom Overlay "*" at 6585,3134 h50 r180
U1_1_3: Mechanical 13 "*" at 7154,3181 h50 r180; Bottom Overlay "*" at 7105,3134 h50 r180
U2: Mechanical 13 "*" at 5074,3981 h50 r180; Bottom Overlay "*" at 5025,3934 h50 r180
U2_1: Mechanical 13 "*" at 5594,3981 h50 r180; Bottom Overlay "*" at 5545,3934 h50 r180
U2_1_1: Mechanical 13 "*" at 6114,3981 h50 r180; Bottom Overlay "*" at 6065,3934 h50 r180
U2_1_2: Mechanical 13 "*" at 6634,3981 h50 r180; Bottom Overlay "*" at 6585,3934 h50 r180
U2_1_3: Mechanical 13 "*" at 7154,3981 h50 r180; Bottom Overlay "*" at 7105,3934 h50 r180
U3: Mechanical 13 "*" at 5074,4781 h50 r180; Bottom Overlay "*" at 5025,4734 h50 r180
U3_1: Mechanical 13 "*" at 5594,4781 h50 r180; Bottom Overlay "*" at 5545,4734 h50 r180
U3_1_1: Mechanical 13 "*" at 6114,4781 h50 r180; Bottom Overlay "*" at 6065,4734 h50 r180
U3_1_2: Mechanical 13 "*" at 6634,4781 h50 r180; Bottom Overlay "*" at 6585,4734 h50 r180
U3_1_3: Mechanical 13 "*" at 7154,4781 h50 r180; Bottom Overlay "*" at 7105,4734 h50 r180
U4: Mechanical 13 "*" at 5074,5581 h50 r180; Bottom Overlay "*" at 5025,5534 h50 r180
U4_1: Mechanical 13 "*" at 5594,5581 h50 r180; Bottom Overlay "*" at 5545,5534 h50 r180
U4_1_1: Mechanical 13 "*" at 6114,5581 h50 r180; Bottom Overlay "*" at 6065,5534 h50 r180
U4_1_2: Mechanical 13 "*" at 6634,5581 h50 r180; Bottom Overlay "*" at 6585,5534 h50 r180
U4_1_3: Mechanical 13 "*" at 7154,5581 h50 r180; Bottom Overlay "*" at 7105,5534 h50 r180